# EAGLE board Xenon_supp (EAGLE 5.06)
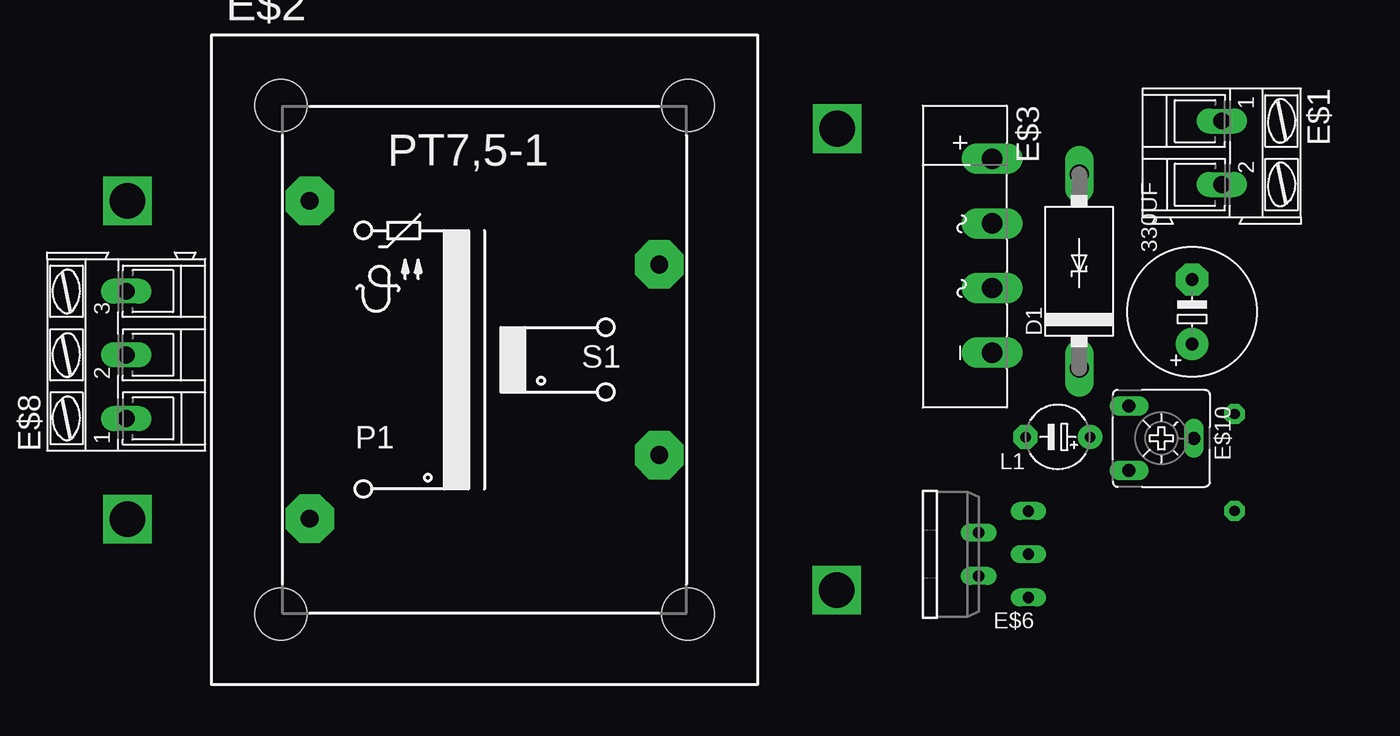
[diagram p0: board, top side]
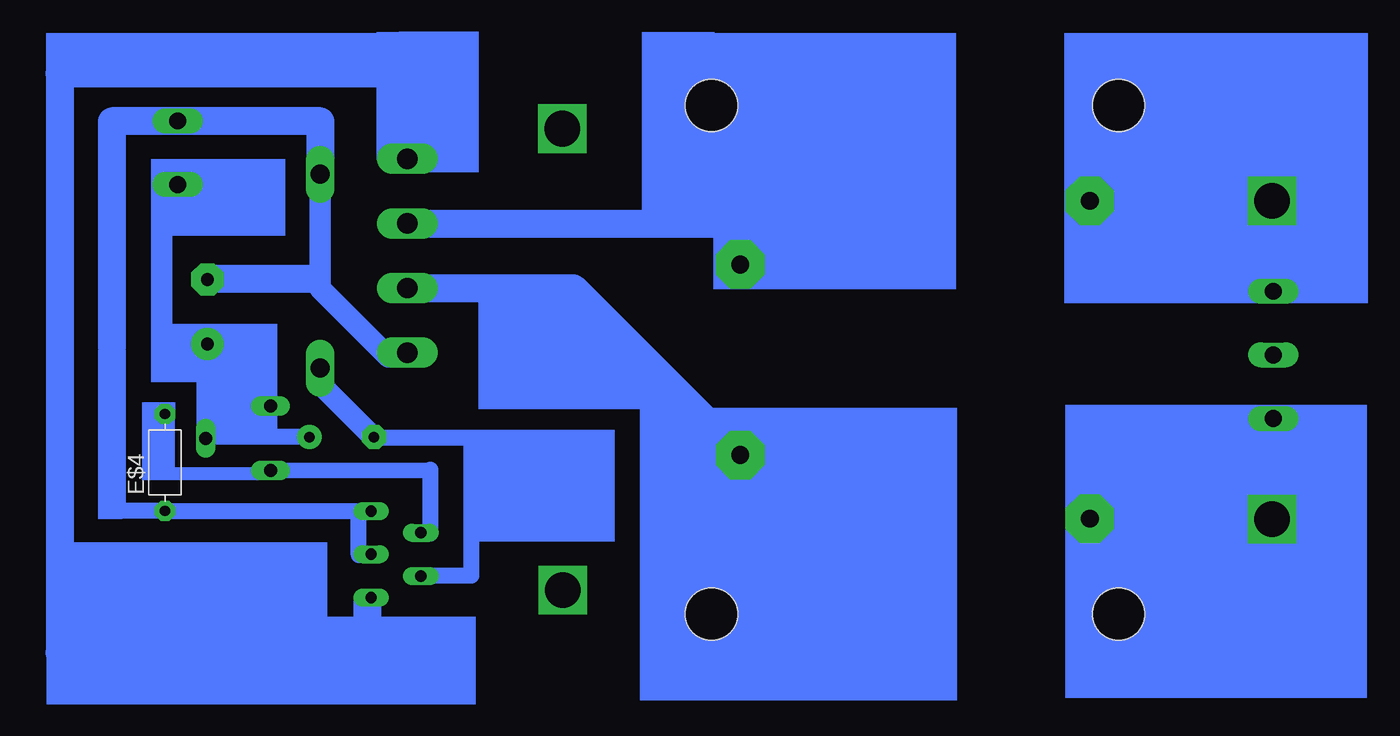
[diagram p1: board, bottom side, seen from below]

No outline drawn. Coordinates in mm, seen from the top.
Copper layers (1*16): Top 0.035mm / dielectric 1.5mm / Bottom 0.035mm
Design rules "default": minimum track width 10mil, minimum drill 24mil, track to track 8mil, track to pad 8mil, pad to pad 8mil, via to via 8mil, smd to smd 8mil, copper to edge 40mil, drill to drill 8mil, minimum pad ring 10mil, minimum via ring 8mil, stop-mask expansion 4mil, vias tented up to drill 0mil, thermal gap 10mil

## Footprints (pad centres in the part's own frame; a part is rotated, then mirrored left to right if it is on the bottom)
E5-10,5 = drill 1.016 pad 2.54 round: + -2.54,0 | drill 1.016 pad 2.54 octagon: - 2.54,0
C4111-15 = drill 1.499 long: A 7.62,0; C -7.62,0
AK300/2 = drill 1.321 long: 1 -2.515,0; 2 2.489,0
PT07,5-1 = drill 1.397 pad 3.81 octagon: 1 -13.741,12.497; 2 -13.741,-12.497; 3 13.741,-7.493; 4 13.741,7.493 | hole 4.115: -16.002,-19.99; -16.002,19.99; 16.002,19.99; 16.002,-19.99
KBU = drill 1.6 long: + -7.62,2.54; - 7.62,2.54; AC1 -2.54,2.54; AC2 2.54,2.54
R-7,5 = drill 0.813 pad 1.6 octagon: 1 -3.81,0; 2 3.81,0
TO220-51 = drill 0.9 long: 1 -3.4,-8.4; 2 -1.7,-4.5; 3 0,-8.4; 4 1.7,-4.5; 5 3.4,-8.4
AK300/3 = drill 1.321 long: 1 -5.004,0; 2 0,0; 3 5.004,0
CA6V = drill 1.016 long: A -2.54,-2.54; E 2.54,-2.54; S 0,2.54
E5-5 = drill 0.813 pad 1.905 round: + -2.54,0 | drill 0.813 pad 1.905 octagon: - 2.54,0

## Placement (x,y rotation side)
330UF  [E5-10,5]  91.13,30.34 90 top
D1  [C4111-15]  82.25,33.53 90 top
E$1  [AK300/2]  93.46,42.83 270 top
E$2  [PT07,5-1]  35.5,26.57 0 top
E$3  [KBU]  72.88,34.75 270 top
E$4  [R-7,5]  94.46,18.49 90 bottom
E$6  [TO220-51]  69.86,11.27 90 top
E$8  [AK300/3]  7.33,26.95 90 top
E$10  [CA6V]  88.71,20.39 270 top
L1  [E5-5]  80.57,20.49 180 top

## Library data of the parts
330UF L1 = rcl
D1 = diode
E$1 E$8 = con-ptr500
E$2 = trafo
E$3 = rectifier
E$4 = discrete
E$6 = linear
E$10 = pot

## Tracks (layer width: path | path; a pad name or v marks a point on that pad's centre or on a via)
S$1  (via drill 2.8)
  other vias: 7.44,39.05 63.24,44.74 63.2,8.45
S$2  (via drill 2.8)
  other vias: 7.43,14.04
S$3
  Bottom 2.184: 75.51,37.29 49.2,37.29 49.2,34
S$4
  Bottom 2.184: 75.51,32.19 62.36,32.19 49.2,19.03
S$5
  Bottom 1.27: 86.14,17.86 73.61,17.91 73.61,12.9
S$6
  Bottom 1.27: 78.14,20.45 70.38,20.45 70.38,9.58 74.38,9.58
S$7
  Bottom 1.016: 86.21,17.6 94.48,17.6 94.48,22.23
S$8
  Bottom 1.27: 83.11,20.5 91.21,20.5
S$9
  Bottom 1.27: 78.02,14.66 94.35,14.65 94.48,14.66
S$10
  Bottom 1.27: 98.63,15.21 98.63,14.68 94.34,14.68
  Bottom 2.184: 98.63,15.21 98.63,27.17
S$11
  Bottom 1.27: 79.24,11.21 79.24,14.62 78.26,14.65
S$12
  Bottom 1.676: 82.27,41.25 82.27,32.16 76.88,26.77
S$13
  Bottom 1.676: 78.12,20.49 82.2,24.57 82.2,27
S$14
  Bottom 2.184: 82.67,32.9 91.05,32.9
S$15
  Bottom 1.422: 91.28,20.67 91.28,27.79
S$16
  Bottom 2.184: 82.23,40.75 82.23,45.32 98.64,45.32 98.64,27.58
S$17
  Bottom 1.676: 91.13,27.86 94.72,27.87 94.72,40.5
S$18
  Bottom 2.184: 75.59,42.43 75.59,49.08 102.75,49.08 102.75,3.54 78.54,3.54 78.54,7.45 78.53,7.45
(copper drawn outside any net)
  shapes: Bottom area x28